# Altium PCB XMeter.PcbDoc
Units mm, origin at the board's own origin, x right, y up, seen from the top; angles counter-clockwise.
Board outline 138 x 50 mm, 2 copper layers (Top Layer, Bottom Layer); 81 components, 64 nets, 309 pads, 163 vias.
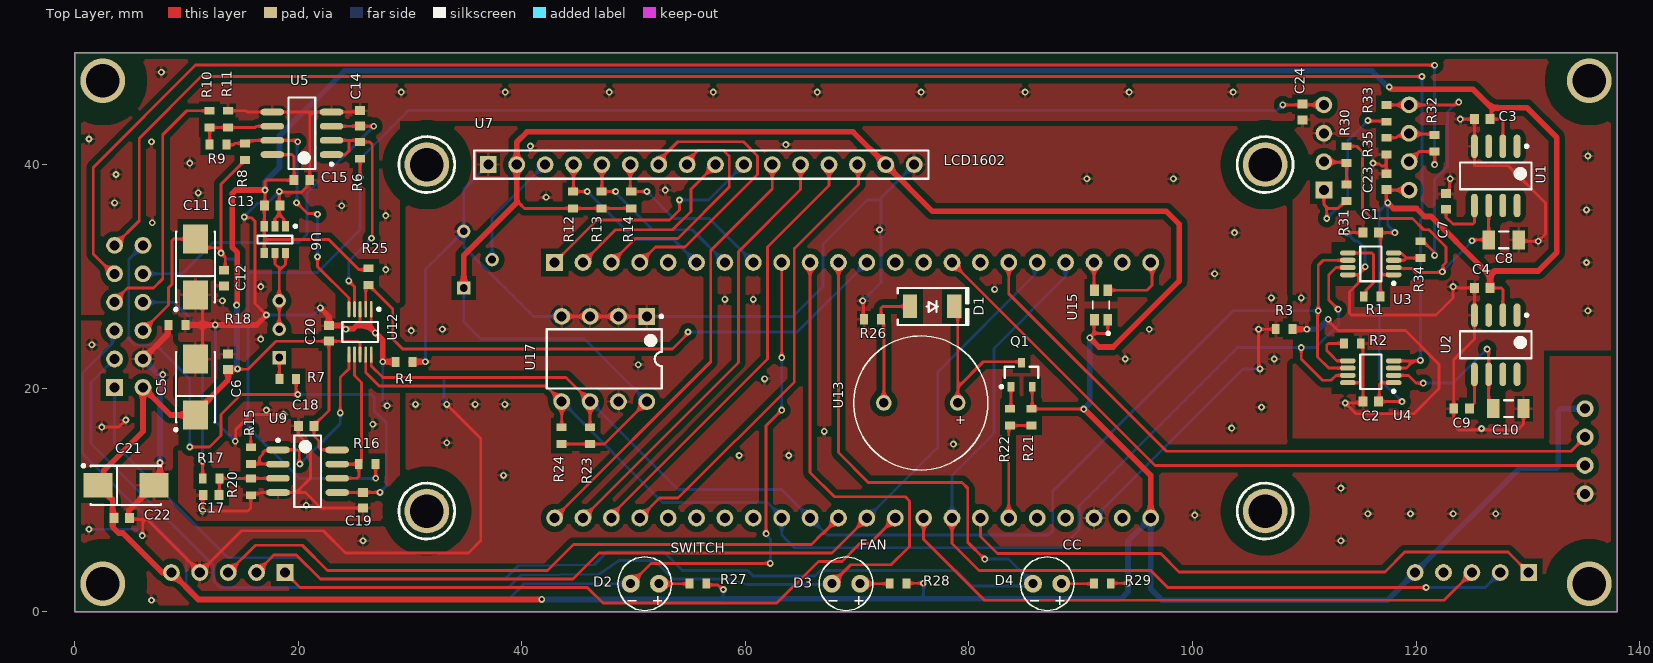
[diagram p0: Top Layer view]
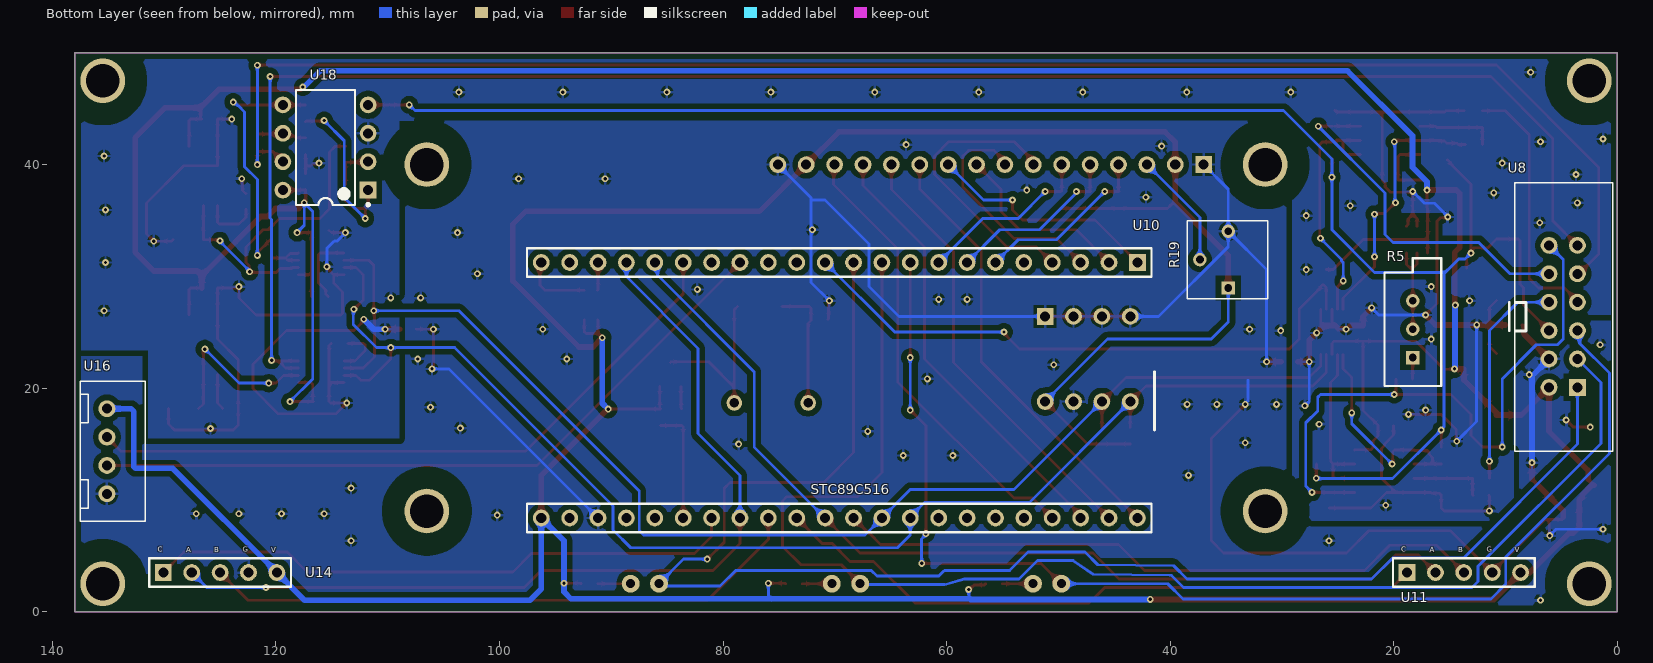
[diagram p1: Bottom Layer view, seen from below]

## Layer stack, top to bottom
Top Solder: solder mask 0.0102, Solder Resist, Dk 3.5
Top Layer: signal copper 0.0356
Dielectric 1: dielectric 0.32, FR-4, Dk 4.8
Bottom Layer: signal copper 0.0356
Bottom Solder: solder mask 0.0102, Solder Resist, Dk 3.5

## Board outline
0,0 138,0 138,50 0,50

## Design rules (kind name [scope] priority, off if disabled: settings)
Clearance Clearance_1 [WithinRoom('RoomDefinition1') or WithinRoom('RoomDefinition2') or WithinRoom('RoomDefinition3') or WithinRoom('RoomDefinition4') vs WithinRoom('RoomDefinition1') or WithinRoom('RoomDefinition2') or WithinRoom('RoomDefinition3') or WithinRoom('RoomDefinition4')] p1: gap=0.2 ignorepadtopadclearanceinfootprint=TRUE
Clearance [Not ( WithinRoom('RoomDefinition1') or WithinRoom('RoomDefinition2') or WithinRoom('RoomDefinition3') or WithinRoom('RoomDefinition4') ) vs Not ( WithinRoom('RoomDefinition1') or WithinRoom('RoomDefinition2') or WithinRoom('RoomDefinition3') or WithinRoom('RoomDefinition4') )] p2: gap=0.508 ignorepadtopadclearanceinfootprint=TRUE except(0.254: Track-THPad)
ComponentClearance [All] p1: gap=0.254 collisioncheckmode=3 verticalgap=0.254 showdistances=FALSE donotcheckwithout3dbody=TRUE
HoleSize [All] p1: absolutevalues=TRUE maxlimit=3.3 minlimit=0.025 maxpercent=80.000 minpercent=20.000
MinimumSolderMaskSliver SOT26A-6L [HasFootprint('SOT26A-6L') vs HasFootprint('SOT26A-6L')] p1: minsoldermaskwidth=0.09
MinimumSolderMaskSliver SG3030CM [HasFootprint('SG3030CM') vs HasFootprint('SG3030CM')] p2: minsoldermaskwidth=0.19
MinimumSolderMaskSliver TSSOP50 [HasFootprint('TSSOP50P490-10AL') vs HasFootprint('TSSOP50P490-10AL')] p3: minsoldermaskwidth=0.046
MinimumSolderMaskSliver [All] p4: minsoldermaskwidth=0.254
PolygonConnect [All] p1: connectstyle=Relief reliefconductorwidth=0.254 reliefentries=4 polygonreliefangle="90 Angle" airgapwidth=0.254
RoomDefinition RoomDefinition4 [False] p1: confinementstyle=ConfineIn formatcopy=TRUE lockcomponents=FALSE outline 15.621,30.607 15.621,35.687 20.066,35.687 20.066,30.607
RoomDefinition RoomDefinition3 [False] p2: confinementstyle=ConfineIn formatcopy=TRUE lockcomponents=FALSE outline 23.283,21.082 23.283,28.829 27.813,28.829 27.813,21.082
RoomDefinition RoomDefinition2 [False] p3: confinementstyle=ConfineIn formatcopy=TRUE lockcomponents=FALSE outline 112.395,19.465 112.395,23.445 119.507,23.445 119.507,19.465
RoomDefinition RoomDefinition1 [False] p4: confinementstyle=ConfineIn formatcopy=TRUE lockcomponents=FALSE outline 119.507,29.117 112.395,29.117 112.395,33.097 119.507,33.097
RoutingVias [All] p1: holewidth=0.305 width=0.61 viastyle="Through Hole" minholewidth=0.305 minwidth=0.61 maxholewidth=0.305 maxwidth=0.61
SMDEntry [InComponentClass('ChipClass')] p1: side=FALSE corner=FALSE anyangle=FALSE
SilkToSolderMaskClearance [IsPad] p1: minsilkscreentomaskgap=0.007 clearancetoexposedcopper=TRUE
SolderMaskExpansion [All] p1: expansion=0.102 istentingtop=FALSE
SupplyNets "Schematic Supply Nets_3" [InNet('-5')] p1: voltage=0.000
SupplyNets "Schematic Supply Nets_2" [InNet('AGND')] p2: voltage=0.000
SupplyNets "Schematic Supply Nets_1" [InNet('+5')] p3: voltage=0.000
SupplyNets "Schematic Supply Nets" [InNet('GND')] p4: voltage=0.000
Width [All] p1: maxlimit=4 minlimit=0.254 preferedwidth=0.254
26 further rules are at their usual default settings.

## Components (designator, comment, footprint, x,y, rotation, side; value= is the part's Value field where it differs from the comment)
C1 "" CAPC1608L 115.951,33.909 r0 top value=104
C2 "" CAPC1608L 115.959,18.796 r0 top value=104
C3 "" CAPC1608L 125.93,44.069 r0 top value=105
C4 "" CAPC1608L 125.93,28.962 r0 top value=105
C5 "16V" TC6032-2412 10.795,20.09 r90 top value=100uF
C6 "" CAPC1608L 13.716,22.352 r270 top value=104
C7 "" CAPC1608L 122.682,36.703 r270 top value=105
C8 "" C1206 127.85,33.274 r0 top value=226
C9 "" CAPC1608L 124.079,18.161 r0 top value=105
C10 "" C1206 128.27,18.161 r0 top value=226
C11 "16V" TC6032-2412 10.795,30.837 r90 top value=100uF
C12 "" CAPC1608L 13.335,29.845 r270 top value=104
C13 "" CAPC1608L 17.653,36.322 r180 top value=474
C14 "" CAPC1608L 25.527,44.134 r270 top value=106
C15 "" CAPC1608L 20.32,38.608 r180 top value=104
C17 "" CAPC1608L 12.192,10.418 r0 top value=106
C18 "" CAPC1608L 20.701,16.629 r0 top value=104
C19 "" CAPC1608L 25.781,9.96 r90 top value=106
C20 "" CAPC1608L 22.733,24.9 r270 top value=104
C21 "16V" TC6032-2412 4.572,11.303 r0 top value=100uF
C22 "" CAPC1608L 4.191,8.382 r180 top value=104
C23 "" CAPC1608L 117.348,38.481 r90 top value=104
C24 "" CAPC1608L 109.855,44.704 r270 top value=104
D1 "SS12" "DO214AC SMA" 76.708,27.305 r0 top
D2 "SWITCH" LED 51,2.5 r270 top locked
D3 "FAN" LED 69,2.5 r270 top locked
D4 "CC" LED 87,2.5 r270 top locked
Q1 "S8550(2TY)" SOT-23B_L 84.709,21.209 r90 top
R1 "" RESC1608L 116.078,28.194 r180 top value=10K
R2 "" RESC1608L 114.308,24.003 r0 top value=10K
R3 "" RESC1608L 108.204,25.273 r180 top value=0R
R4 "" RESC1608L 29.464,22.352 r0 top value=0R
R5 "" VR5 18.288,25.273 r90 bottom value=10K
R6 "" RESC1608L 25.527,41.275 r90 top value=47K
R7 "" RESC1608L 19.05,20.828 r0 top value=43K
R8 "" RESC1608L 15.24,41.148 r90 top value=47K
R9 "" RESC1608L 12.815,41.783 r180 top value=20K
R10 "" RESC1608L 12.065,44.069 r90 top value=150K
R11 "" RESC1608L 13.716,44.069 r90 top value=20K
R12 "" RESC1608L 44.577,36.83 r90 top value=4.7K
R13 "" RESC1608L 47.117,36.83 r90 top value=4.7K
R14 "" RESC1608L 49.784,36.83 r90 top value=4.7K
R15 "" RESC1608L 15.748,13.962 r270 top value=47K
R16 "" RESC1608L 26.162,13.208 r180 top value=47K
R17 "" RESC1608L 12.192,11.93 r0 top value=10M
R18 "" RESC1608L 9.144,25.654 r180 top value=0R
R19 "" VR4 36.068,31.496 r90 bottom value=1K
R20 "" RESC1608L 15.748,11.168 r270 top value=1M
R21 "" RESC1608L 85.598,17.399 r90 top value=10K
R22 "" RESC1608L 83.693,17.399 r90 top value=4.7K
R23 "" RESC1608L 46.101,15.748 r90 top value=10K
R24 "" RESC1608L 43.561,15.748 r90 top value=10K
R25 "" RESC1608L 26.289,29.972 r270 top value=10K
R26 "" RESC1608L 71.374,26.162 r0 top value=100
R27 "" RESC1608L 55.753,2.5 r0 top value=1K
R28 "" RESC1608L 73.66,2.5 r0 top value=1K
R29 "" RESC1608L 91.936,2.5 r0 top value=1K
R30 "" RESC1608L 113.792,40.894 r90 top value=30K
R31 "" RESC1608L 113.792,37.477 r270 top value=1K
R32 "" RESC1608L 121.666,41.91 r90 top value=10K
R33 "" RESC1608L 117.348,44.577 r270 top value=10K
R34 "" RESC1608L 120.396,32.385 r90 top value=10K
R35 "" RESC1608L 117.348,41.656 r270 top value=10K
U1 "REF5025" SOP127P636-8L 127.135,38.989 r270 top
U2 "REF5025" SOP127P636-8L 127.135,23.882 r270 top
U3 "DAC8571" TSOP65P490-8AL 115.951,31.115 r180 top
U4 "DAC8571" TSOP65P490-8AL 115.951,21.463 r180 top
U5 "OPA2335" SOP127P636-8L 20.32,42.799 r180 top
U6 "REF3230" SOT26A-6L 17.907,33.282 r270 top
U7 "LCD1602" LCD1602 37,40 r0 top locked
U8 "DC3-12P" DC3-12P 3.556,20.066 r90 bottom
U9 "OPA2335" SOP127P636-8L 20.828,12.565 r0 top
U10 "STC89C516CORE" STC89516CORE 42.926,31.242 r0 bottom locked
U11 "CODEKEY(MOD)" CODEKEY 18.8,3.5 r180 bottom locked
U12 "ADS1115" TSSOP50P490-10AL 25.527,25.027 r270 top
U13 "BEEPER" BEEPER 75.692,18.669 r180 top
U14 "CODEKEY(SET)" CODEKEY 130.08,3.5 r180 bottom locked
U15 "SG3030CM" SG3030CM 91.821,27.432 r90 top
U16 "SERIAL4P" X254-4P 135.128,14.351 r90 bottom
U17 "AT24C04" DIP-8 47.371,22.606 r270 top
U18 "TL082" DIP-8 115.57,41.529 r0 bottom locked

## Footprints (in the part's own frame and the unit in brackets; to place one, negate y for a bottom-side part, rotate by r counter-clockwise, add the part's x,y. Pads: shape width x height; smd on the part's side, far side on the other; paste and mask are expansions set on the pad)
BEEPER [mm] "BEEPER"
  round 1.4 hole 0.85: 1(-3.3,0) 2(3.3,0)
  silkscreen extent -6,-6 6,6
C1206 [mm] "Chip Capacitor, Body 3.2x1.6mm, IPC High Density"
  rect 1.1x1.7 smd: 1(-1.35,0) 2(1.35,0)
  silkscreen extent -0.4,-0.75 0.4,0.75, body extent -1.7,-0.9 1.7,0.9, height 1.3
CAPC1608L [mm] "Chip Capacitor, Body 1.6x0.8mm, IPC High Density"
  rect 0.8x0.9 smd: 1(-0.7,0) 2(0.7,0)
  body extent -0.87,-0.48 0.87,0.48, height 0.85
CODEKEY [mm] "CODEKEY"
  rect 1.5x1.5 hole 0.9: 1(0,0)
  round 1.5 hole 0.9: 2(2.54,0) 3(5.08,0) 4(7.62,0) 5(10.16,0)
  silkscreen extent -1.27,-1.27 11.43,1.27
DC3-12P [mm] "Connector; Header; 6x2 Position"
  rect 1.5x1.5 hole 0.9: 1(0,0)
  round 1.5 hole 0.9: 2(2.54,0) 3(5.08,0) 4(7.62,0) 5(10.16,0) 6(12.7,0) 7(12.7,2.54) 8(10.16,2.54) 9(7.62,2.54) 10(5.08,2.54) 11(2.54,2.54) 12(0,2.54)
  silkscreen extent -5.71,-3.18 18.29,6.1
DIP-8 [mm] "DIP; 8 Leads; Row Spacing 7.62 mm; Pitch 2.54 mm"
  rect 1.5x1.5 hole 0.9: 1(-3.81,3.81)
  round 1.5 hole 0.9: 2(-3.81,1.27) 3(-3.81,-1.27) 4(-3.81,-3.81) 5(3.81,-3.81) 6(3.81,-1.27) 7(3.81,1.27) 8(3.81,3.81)
  silkscreen extent -3.93,-5.15 2.65,5.24, body extent -3.6,-5.15 3.6,5.15, height 5.08
"DO214AC SMA" [mm] "Molded Diode, 2-Leads, Body 4.30x2.60mm, IPC Medium Density"
  rect 1.27x2.1 smd: 1(-1.985,0) 2(1.985,0)
  silkscreen extent -3.08,-1.65 3.25,1.65, body extent -2.6,-1.37 2.6,1.37, height 2.4
LCD1602 [mm] "LCD1602"
  round 4 hole 3: 0(-5.5,-31) 0(-5.5,0) 0(69.5,-31) 0(69.5,0)
  rect 1.5x1.5 hole 0.9: 1(0,0)
  round 1.5 hole 0.9: 2(2.54,0) 3(5.08,0) 4(7.62,0) 5(10.16,0) 6(12.7,0) 7(15.24,0) 8(17.78,0) 9(20.32,0) 10(22.86,0) 11(25.4,0) 12(27.94,0) 13(30.48,0) 14(33.02,0) 15(35.56,0) 16(38.1,0)
  silkscreen extent -8,-33.5 72,2.5
LED [mm] "LED; 2 Leads"
  round 1.6 hole 0.8: 1(0,1.27) 2(0,-1.27)
  silkscreen extent -2.4,-2.4 2.4,2.4
RESC1608L [mm] "Chip Resistor, Body 1.6x0.8mm, IPC High Density"
  rect 0.7x0.9 smd: 1(-0.75,0) 2(0.75,0)
  body extent -0.85,-0.48 0.85,0.48, height 0.6
SG3030CM [mm]
  rect 1.05x0.8 smd: 1(-1.325,-0.6) 2(1.325,-0.6) 3(1.325,0.6) 4(-1.325,0.6)
  silkscreen extent -2.66,-0.76 0.38,0.75
SOP127P636-8L [mm] "SOP, 8-Leads, Body 6x4.7mm, Pitch 1.27mm, IPC High Density"
  oval 2.1x0.6 smd: 1(-2.65,1.905) 2(-2.65,0.635) 3(-2.65,-0.635) 4(-2.65,-1.905) 5(2.65,-1.905) 6(2.65,-0.635) 7(2.65,0.635) 8(2.65,1.905)
  silkscreen extent -2.77,-3.2 1.2,3.2, body extent -2.36,-3.18 2.36,3.18, height 1.5
SOT26A-6L [mm] "SOT23, 6-Leads, Body 2.9x1.7mm, Pitch 0.95mm, Lead Span 2.8mm, IPC High Density"
  rect 0.9x0.65 smd: 1(-1.2,0.95) 2(-1.2,0) 3(-1.2,-0.95) 4(1.2,-0.95) 5(1.2,0) 6(1.2,0.95)
  silkscreen extent -1.32,-1.55 0.35,1.95, body extent -0.9,-1.55 0.9,1.55, height 1.45
SOT-23B_L [mm] "SOT23, 3-Leads, Body 2.9x1.3mm, Pitch 0.95mm, Lead Span 2.4mm, IPC High Density"
  rect 0.85x0.6 smd: 1(-1.075,0.95) 2(-1.075,-0.95) 3(1.075,0)
  silkscreen extent -1.2,-1.5 0.7,1.92, body extent -0.7,-1.5 0.7,1.5, height 1.14
STC89516CORE [mm]
  rect 1.5x1.5 hole 0.9: 1(0,0)
  round 1.5 hole 0.9: 2(2.54,0) 3(5.08,0) 4(7.62,0) 5(10.16,0) 6(12.7,0) 7(15.24,0) 8(17.78,0) 9(20.32,0) 10(22.86,0) 11(25.4,0) 12(27.94,0) 13(30.48,0) 14(33.02,0) 15(35.56,0) 16(38.1,0) 17(40.64,0) 18(43.18,0) 19(45.72,0) 20(48.26,0) 21(50.8,0) 22(53.34,0) 23(53.34,22.86) 24(50.8,22.86) 25(48.26,22.86) 26(45.72,22.86) 27(43.18,22.86) 28(40.64,22.86) 29(38.1,22.86) 30(35.56,22.86) 31(33.02,22.86) 32(30.48,22.86) 33(27.94,22.86) 34(25.4,22.86) 35(22.86,22.86) 36(20.32,22.86) 37(17.78,22.86) 38(15.24,22.86) 39(12.7,22.86) 40(10.16,22.86) 41(7.62,22.86) 42(5.08,22.86) 43(2.54,22.86) 44(0,22.86)
  silkscreen extent -1.52,-1.27 54.61,24.13
TC6032-2412 [mm] "Capacitor, SM Tantalum; Body 6.0 x 3.2 mm (LxW typ)"
  rect 2.6x2.2 smd: 1(-2.5,0) 2(2.5,0)
  silkscreen extent -3.92,-1.75 3.15,1.87
TSOP65P490-8AL [mm] "TSOP, 8-Leads, Body 3x3mm, Pitch 0.65mm, IPC High Density"
  oval 1.4x0.45 smd: 1(-2.05,0.975) 2(-2.05,0.325) 3(-2.05,-0.325) 4(-2.05,-0.975) 5(2.05,-0.975) 6(2.05,-0.325) 7(2.05,0.325) 8(2.05,0.975)
  silkscreen extent -2.17,-1.55 0.95,1.87, body extent -1.6,-1.6 1.6,1.6, height 1.1
TSSOP50P490-10AL [mm] "TSSOP, 10-Leads, Body 3x3mm, Pitch 0.5mm, IPC High Density"
  oval 1.45x0.25 smd: 1(-2.025,1) 2(-2.025,0.5) 3(-2.025,0) 4(-2.025,-0.5) 5(-2.025,-1) 6(2.025,-1) 7(2.025,-0.5) 8(2.025,0) 9(2.025,0.5) 10(2.025,1)
  silkscreen extent -2.15,-1.6 0.9,1.8, body extent -1.6,-1.6 1.6,1.6, height 1.1
VR4 [mm] "Thru-Hole; 3 Leads"
  rect 1.2x1.2 hole 0.7: 1(-2.54,-1.27)
  round 1.2 hole 0.7: 2(2.54,-1.27) 3(0,1.27)
  silkscreen extent -3.5,-4.8 3.5,2.41, body extent -3.56,-4.83 3.56,2.41, height 5
VR5 [mm] "Thru-Hole; 3 Leads"
  round 1.2 hole 0.7: 1(2.54,0) 3(0,0)
  rect 1.2x1.2 hole 0.7: 2(-2.54,0)
  silkscreen extent -5.08,-2.54 6.35,2.54, body extent -4.95,-2.29 4.95,2.29, height 10
X254-4P [mm] "X254-4P"
  oval 1.5x1.524 hole 0.9: 1(-3.81,0) 2(-1.27,0) 3(1.27,0) 4(3.81,0)
  silkscreen extent -6.25,-3.43 6.25,2.41, body extent -6.22,-3.43 6.22,2.41, height 7

## Part data
C1 C2 C3 C4 C6 C7 C8 C9 C10 C12 C13 C14 C15 C17 C18 C19 C20 C22 C23 C24: library part Cap, "Capacitor", LatestRevisionDate=17-Jul-2002, LatestRevisionNote="Re-released for DXP Platform.", PackageDescription="Radial Cap, Thru-Hole; 2 Leads; 0.3 in Pin Spacing", PackageReference=RAD-0.3, Published=8-Jun-2000, Publisher="Altium Limited"
C5 C11 C21: library part "Cap Pol1", "Polarized Capacitor (Radial)", LatestRevisionDate=17-Jul-2002, LatestRevisionNote="Re-released for DXP Platform.", PackageDescription="Polarized Capacitor (Radial); 2 Leads", PackageReference=RB7.6-15, Published=8-Jun-2000, Publisher="Altium Limited"
D1: library part "Diode 1N4007", "1 Amp General Purpose Rectifier", Code_JEDEC=DO-204-AL, ComponentLink1Description="Manufacturer Link", ComponentLink1URL=http://www.fairchildsemi.com/, ComponentLink2Description=Datasheet, ComponentLink2URL=http://www.fairchildsemi.com/ds/1N%2F1N4001.pdf, DatasheetVersion=1998, LatestRevisionDate=17-Jul-2002, LatestRevisionNote="Re-released for DXP Platform.", PackageDescription="Diode, Axial; Body 5.2 x 2.7 mm (LxDia. max), Lead Dia. 0.86 mm (max)", PackageReference=DO-41, PackageVersion=Aug-1999, Published=8-Jun-2000, Publisher="Altium Limited"
D2 D3 D4: library part LED1, "Typical RED GaAs LED", LatestRevisionDate=08-Jul-2005, LatestRevisionNote="Mech Layer 1 removed.", PackageDescription="LED; 2 Leads", PackageReference=LED-1, Published=8-Jun-2000, Publisher="Altium Limited"
Q1: library part PNP, "PNP Bipolar Transistor", LatestRevisionDate=29-May-2009, LatestRevisionNote="IPC-7351 Footprint Added.", PackageDescription="3-Pin SOT-23 Package 0.95 mm Pitch, 2.4 mm Lead Span", PackageReference=SOT-23B, PackageVersion=Aug-1999, Published=8-Jun-2000, Publisher="Altium Limited"
R1 R2 R3 R4 R6 R7 R8 R9 R10 R11 R12 R13 R14 R15 R16 R17 R18 R20 R21 R22 R23 R24 R25 R26 R27 R28 R29 R30 R31 R32 R33 R34 R35: library part Res1, "Resistor", LatestRevisionDate=17-Jul-2002, LatestRevisionNote="Re-released for DXP Platform.", PackageDescription="Axial Device, Thru-Hole; 2 Leads; 0.3 in Pin Spacing", PackageReference=AXIAL-0.3, Published=8-Jun-2000, Publisher="Altium Limited"
R5 R19: library part RPot, "Potentiometer", LatestRevisionDate=17-Jul-2002, LatestRevisionNote="Re-released for DXP Platform.", PackageDescription="Variable Resistor, Thru-Hole; 3 Leads", PackageReference=VR5, Published=8-Jun-2000, Publisher="Altium Limited", Set Position=0.5, Sim Note="Enter the Resistance value and the set point into parameter fields."
U11 U14: library part CODEKEY, "CODEKEY"

## Free pads (board coordinates)
  round 4 hole 3: 0(2.5,2.5) 0(135.5,2.5) 0(135.5,47.5)
  round 4 hole 3 mask+0.102: 0(2.5,47.5)

## Via types
v1: diameter 0.61, hole 0.305, Top Layer to Bottom Layer, 163 vias

## Nets (pads, with @x,y where several pads share a name; then routed paths per layer and width w, separated by ;. In a path a pad name is that pad's centre, name@x,y a point inside that pad or via, vN(x,y) a via of type N, cw(c..) or ccw(c..) an arc to the next point about the centre after c; other vN are vias at no path point)
+5: C1.2 C2.2 C3.2 C4.2 C5.1 C6.2 C13.2 C15.2 C18.2 C20.2 C21.1 C22.2 C23.1 Q1.2 R1.1 R12.1 R13.1 R14.1 R19.1 R21.2 R23.1 R24.1 R25.1 R27.2 R28.2 R29.2 U1.2 U2.2 U3.1 U4.1 U5.8 U6.3 U6.4 U7.2 U7.15 U8.12 U9.8 U10.23 U11.5 U12.8 U14.5 U15.1 U15.4 U16.4 U17.8 U18.8 | length 624.8
  Top Layer w0.254: C21.1 C21.1@2.602,11.833 ; C5.1 C5.1@10.795,17.79 ; C6.2@13.716,21.69 C6.2@13.743,21.717 ; v1(14.554,21.717) 14.581,21.69 15.506,21.69 18.016,24.2 C20.2 ; U6.4 16.957,33.282 ; U5.8 19.431,40.894 19.62,40.705 C15.2 17.167,38.608 17.018,38.459 v1(17.018,37.719) 17.018,37.465 17.018,36.129 16.957,36.068 U6.3 16.957,33.282 ; U9.8 23.47,14.478 22.047,14.478 21.844,14.681 21.844,15.272 21.401,15.715 C18.2 21.401,16.679 22.733,18.011 C20.2 ; U12.8 25.527,24.003 25.33,24.2 C20.2 ; R25.1@26.027,30.603 25.404,30.603 22.725,33.282 16.957,33.282 ; 39.54,36.619 39.54,36.787 40.247,36.08 R12.1 R13.1 R14.1 ; R24.1 R23.1 47.383,14.998 U17.8 ; R27.2 56.615,2.388 57.522,2.388 57.93,1.981 v1(58.026,1.981) ; R28.2 74.45,2.54 v1(75.946,2.54) ; Q1.2 85.659,18.21 R21.2 85.613,18.134 90.264,18.134 v1(90.279,18.119) ; v1(90.805,24.511) 91.186,24.892 ; U15.4 91.186,26.072 91.186,24.892 ; U15.1 92.421,25.041 92.272,24.892 91.186,24.892 ; R29.2 92.726,2.54 v1(94.234,2.54) ; R1.1 116.828,30.353 ; v1(117.475,36.576) 117.475,36.672 117.348,36.799 C23.1 117.41,37.719 U18.8 ; U4.1 116.881,20.488 116.713,20.32 116.713,18.85 C2.2 v1(118.745,18.796) ; U3.1 117.053,30.14 116.84,30.353 116.84,33.974 116.905,33.909 v1(118.11,33.909) ; C4.2@126.636,28.956 127.621,28.956 127.77,28.807 U2.2 ; 126.746,45.085 126.746,44.185 C3.2 127.621,44.069 127.77,43.92 U1.2
  Top Layer w0.508: C21.1 2.272,11.303 3.118,10.457 3.118,10.257 3.383,9.992 3.383,7.581 3.921,7.043 4.284,7.043 7.827,3.5 U11.5 11.048,1.092 v1(41.783,1.092) ; C21.1@2.602,11.833 2.602,12.635 6.096,16.129 U8.12 8.572,17.59 C5.1 ; C5.1@10.795,17.79 13.716,20.711 C6.2 ; C6.2@13.743,21.717 v1(14.554,21.717) ; v1(14.478,27.432) 14.478,27.46 14.547,27.529 14.547,32.123 14.097,32.573 14.097,37.421 14.395,37.719 v1@16.99,37.719 ; R19.1 34.798,31.877 39.54,36.619 ; 39.54,36.787 U7.2 39.54,42.015 40.451,42.926 69.634,42.926 U7.15 76.746,35.814 97.663,35.814 98.806,34.671 98.806,29.591 92.9,23.685 91.63,23.685 v1(90.805,24.511) ; v1@90.309,18.149 96.266,12.192 U10.23 ; v1(117.475,36.576) 117.983,36.068 120.052,36.068 120.763,35.357 121.361,35.357 123.571,33.147 123.571,33.126 126.63,30.067 ; v1(117.602,46.939) 117.63,46.939 117.833,46.736 125.095,46.736 126.746,45.085 129.921,45.085 132.588,42.418 132.588,32.131 130.937,30.48 127.043,30.48 126.63,30.067 ; C4.2 126.63,30.067
  Bottom Layer w0.254: v1(14.478,27.432) v1@14.516,27.394 ; v1@14.516,21.755 v1(14.554,21.717) ; R19.1 34.798,25.908 36.322,24.384 45.593,24.384 U17.8 ; 57.89,1.143 57.915,1.168 57.988,1.241 v1(58.026,1.981) ; 75.692,1.143 75.946,1.397 v1(75.946,2.54) ; v1@117.506,46.939 v1(117.602,46.939) ; v1@118.11,33.937 117.475,34.572 v1(117.475,36.576) 116.713,35.814 116.713,20.828 v1(118.745,18.796)
  Bottom Layer w0.508: v1@14.516,21.755 v1@14.516,27.394 ; v1(17.018,37.719) 17.018,38.459 18.318,39.759 18.318,42.575 24.13,48.387 116.058,48.387 v1@117.506,46.939 ; v1(41.783,1.092) 57.839,1.092 57.89,1.143 75.692,1.143 75.946,1.143 93.599,1.143 94.234,1.778 v1@94.234,2.286 ; v1(90.279,18.119) 90.805,18.645 v1(90.805,24.511) ; v1(94.234,2.54) 94.234,6.35 U10.23 96.266,2.032 97.282,1.016 117.436,1.016 U14.5 129.247,12.827 132.566,12.827 132.715,12.976 132.715,17.907 132.969,18.161 U16.4 ; v1(118.11,33.909) v1@118.11,33.937
-5: C11.2 C12.1 C24.1 R6.1 R8.1 R15.1 R16.1 U8.10 U18.4 | length 165.8
  Top Layer w0.254: U8.10 8.382,27.432 8.382,28.978 8.699,29.294 8.699,33.188 8.847,33.337 C11.2 11.567,32.565 12.806,32.565 v1@13.013,32.359 ; C12.1@13.462,30.734 13.462,31.699 v1(13.081,32.08) 13.081,38.239 14.917,40.075 14.917,40.175 15.14,40.398 R8.1 ; R15.1 v1(15.748,16.256) ; v1(25.527,38.862) R6.1 ; R16.1 26.918,13.202 26.918,11.936 v1(26.924,11.93) ; v1(108.077,45.339) 109.79,45.339 C24.1 109.92,45.339 U18.4
  Bottom Layer w0.254: v1(13.081,32.08) 13.612,31.549 14.171,31.549 15.032,30.688 15.367,30.353 ; v1@26.924,11.9 20.104,11.9 v1(15.748,16.256) 15.748,16.329 15.494,16.583 15.494,30.226 15.367,30.353 ; v1(108.077,45.339) 107.569,44.831 29.845,44.831 25.527,40.513 v1(25.527,38.862) 25.527,34.163 21.717,30.353 15.367,30.353
ADC_CURRENT: R6.2 U5.1 U5.2 U12.4 | length 22.1
  Top Layer w0.254: U5.1 24.198,40.894 24.545,41.241 24.545,42.071 24.638,42.164 ; U5.2 24.638,42.164 ; v1(24.511,29.591) 25.027,29.075 25.027,28.829 U12.4 ; R6.2@25.273,42.025 25.134,42.164 24.638,42.164 ; R6.2 26.394,42.025 26.612,41.807 26.612,33.722 ; v1(26.543,33.401) 26.611,33.469 26.611,33.721
  Bottom Layer w0.254: v1(24.511,29.591) 24.511,31.22 24.66,31.369 24.66,31.518 v1(26.543,33.401)
ADC_TEMP: R16.2 U9.6 U9.7 U12.7 | length 15.2
  Top Layer w0.254: U9.6 25.263,11.93 25.412,12.079 R16.2 ; U9.7 25.404,13.2 R16.2 ; U12.7 25.027,21.139 25.084,21.082 25.654,20.512 25.654,13.68 25.635,13.661 25.635,13.431 R16.2
ADC_VDIS: R15.2 U9.1 U9.2 U12.6 | length 19.8
  Top Layer w0.254: R15.2 15.754,13.206 16.51,13.206 ; U9.2 18.172,13.206 16.51,13.206 ; v1(20.142,13.208) 20.074,13.276 20.074,14.313 19.917,14.47 U9.1 18.112,14.404 16.982,14.404 16.833,14.255 16.833,14.099 16.51,13.776 16.51,13.206 ; v1(23.749,17.78) 23.749,20.955 23.876,21.082 24.527,21.733 U12.6
  Bottom Layer w0.254: v1(20.142,13.208) 23.749,16.815 v1(23.749,17.78)
ADC_VOUT: R8.2 R9.1 U5.7 U12.5 | length 24.2
  Top Layer w0.254: R9.1 14.224,41.783 14.351,41.91 15.228,41.91 R8.2 15.463,42.121 15.959,42.121 16.002,42.164 U5.7 19.716,42.164 19.843,42.037 v1(19.939,42.037) ; v1(19.837,36.583) 19.856,36.583 20.418,36.021 20.811,35.628 21.649,35.628 v1(21.717,35.56) ; v1(21.717,31.75) 21.717,30.861 24.527,28.051 U12.5
  Bottom Layer w0.254: v1(19.837,36.583) 19.894,36.64 19.894,41.992 v1(19.939,42.037) ; v1@21.59,35.687 v1(21.717,35.56) v1(21.717,31.75)
AGND: C1.1 C2.1 C3.1 C4.1 C5.2 C6.1 C7.1 C8.2 C9.1 C10.2 C11.1 C12.2 C13.1 C14.1 C15.1 C17.1 C18.1 C19.1 C20.1 C23.2 C24.2 R2.2 R3.1 R4.1 R11.2 R18.1 R20.2 R35.2 U1.4 U2.4 U3.8 U4.8 U5.4 U5.5 U6.1 U6.2 U9.4 U12.1 U12.3 U18.3 | length 221.4
  Top Layer w0.254: C5.2@10.795,23.09 11.43,23.725 11.43,25.654 11.43,27.202 C11.1@10.795,27.837 ; C17.1 11.43,10.356 v1(11.43,9.017) 15.494,9.017 15.748,9.271 R20.2 15.924,10.594 16.579,10.594 16.645,10.66 U9.4 19.804,10.66 ; R11.2 15.317,44.819 15.367,44.769 15.432,44.704 U5.5 21.336,44.704 ; v1(14.351,15.24) 14.396,15.285 14.396,16.053 14.406,16.063 14.406,16.311 15.748,17.653 v1(18.669,17.653) 18.977,17.653 ; v1(15.164,35.306) 15.232,35.238 15.621,35.238 15.816,35.238 16.129,34.925 16.129,30.607 16.129,27.559 v1(17.145,26.543) ; U6.2 17.907,35.179 18.288,35.56 ; U6.1 18.709,34.63 18.709,35.139 18.288,35.56 ; C18.1 20.001,15.809 20.828,14.982 20.828,14.859 21.082,14.605 21.082,11.938 19.804,10.66 ; v1@24.161,25.273 v1(24.257,25.273) v1@24.308,25.324 ; 25.219,25.6 25.527,25.908 U12.3 ; C14.1@25.273,44.834 25.143,44.704 U5.4 21.336,44.704 ; C19.1 25.77,9.271 22.027,9.271 20.638,10.66 19.804,10.66 ; 26.235,25.6 26.527,25.892 U12.1 ; v1@27.872,18.347 v1(27.94,18.415) ; v1@112.268,25.908 113.03,25.146 119.058,25.146 122.069,22.136 122.069,19.961 119.819,17.711 114.623,17.711 v1(113.665,18.669) 115.132,18.669 C2.1 115.259,20.25 ; v1(113.792,33.909) 115.047,33.909 C1.1@115.251,34.113 ; U4.8 115.021,20.488 115.259,20.25 ; U3.8 114.849,30.14 ; R2.2 115.259,23.802 115.259,20.25 ; v1(115.443,30.861) 115.443,30.765 115.016,30.337 115.016,30.307 114.849,30.14 ; v1(116.151,40.132) 116.219,40.064 116.743,40.064 116.928,39.878 117.182,39.878 117.348,40.044 ; C23.2 117.348,40.044 ; R35.2 117.348,40.044 ; C7.1 122.732,37.403 123.005,37.676 123.005,38.677 v1(123.063,38.735) ; v1(123.952,44.069) C3.1 U1.4 125.23,39.901 128.247,39.901 131.572,36.576 131.572,33.782 v1(130.937,33.147) 129.327,33.147 C8.2 ; C10.2 129.62,16.8 129.054,16.234 129.032,16.256 123.825,16.256 123.379,16.702 C9.1 123.379,22.541 125.23,24.392 U2.4 C4.1 123.534,28.962 123.413,29.083 v1(123.317,29.083) 123.317,28.067 121.793,26.543 114.195,26.543 114.046,26.692 114.046,28.61 114.828,29.393 114.828,30.119 114.849,30.14 ; 18.288,35.56 18.288,36.257 C13.1 18.288,36.387 v1(18.288,37.592) 18.384,37.592 18.453,37.523 20.283,37.523 20.747,37.987 20.747,38.335 C15.1 21.02,44.388 21.336,44.704
  Top Layer w0.508: R18.1@10.021,25.654 11.43,25.654 v1(12.573,25.654) 16.256,25.654 v1(17.145,26.543) ; v1(21.971,27.178) 22.733,26.416 C20.1 23.283,25.6 23.834,25.6 v1@24.161,25.273 ; v1@24.308,25.324 24.943,25.324 25.219,25.6 26.235,25.6 27.559,24.276 v1(27.559,22.352) R4.1@28.587,22.352 ; R3.1 v1(110.236,25.273)
  Bottom Layer w0.254: v1(12.573,25.654) 12.573,17.018 v1(14.351,15.24) ; v1(15.164,35.306) 15.164,35.357 16.342,36.535 17.231,36.535 v1(18.288,37.592) ; v1(17.145,26.543) 21.336,26.543 v1(21.971,27.178) ; v1(27.559,22.352) 27.559,18.796 v1(27.94,18.415) v1@28.048,18.307 ; v1(113.792,33.909) 114.525,33.176 114.779,33.176 114.858,33.097 115.443,32.512 v1(115.443,30.861)
  Bottom Layer w0.508: v1(110.236,25.273) 111.252,25.273 v1(112.141,26.162)
  other v1: 20.701,9.525 125.857,16.383 26.67,16.764 17.145,18.034 16.637,24.384 26.897,24.938 135.382,26.924 13.208,27.813 109.728,28.067 16.637,29.083 27.813,30.607 135.255,31.242 6.934,34.798 27.813,35.433 135.255,35.941 23.876,36.322 3.556,36.576 11.049,37.465 3.683,39.116 10.287,40.132 135.382,40.767 6.858,42.037 1.27,42.291 29.21,46.482 38.513,46.482 47.816,46.482 57.118,46.482 66.421,46.482 75.724,46.482 85.026,46.482 94.329,46.482 103.632,46.482 7.747,48.26
BEEPER: R21.1 R22.1 U10.28 | length 10.2
  Top Layer w0.254: U10.28 83.566,16.522 R22.1 R21.1
CC: D4.2 U8.1 U10.11 | length 137.1
  Top Layer w0.254: U10.11 68.326,14.224 70.993,11.557 79.375,11.557 79.895,11.037 79.895,6.211 v1(81.407,4.699)
  Bottom Layer w0.254: U8.1 3.556,14.986 13.716,4.826 20.066,4.826 21.971,2.921 38.485,2.921 39.676,4.112 46.482,4.191 47.625,5.334 52.705,5.334 54.356,3.683 60.198,3.683 60.272,3.609 60.705,3.176 66.233,3.176 66.738,3.681 78.869,3.681 80.264,2.286 85.516,2.286 D4.2 83.531,4.699 v1(81.407,4.699)
FAN: D3.2 U8.2 U10.10 | length 123.6
  Top Layer w0.254: U10.10 65.786,12.446 67.945,10.287 74.295,10.287 74.676,9.906 74.676,5.842 73.025,4.191 69.421,4.191 D3.2
  Bottom Layer w0.254: U8.2 1.46,20.511 1.46,15.05 12.446,4.064 12.446,2.689 12.976,2.159 38.8,2.159 39.83,3.189 39.903,3.262 40.007,3.263 46.887,3.343 48.661,4.572 51.868,4.572 53.511,2.929 53.511,2.921 58.415,2.921 60.175,2.414 67.644,2.414 D3.2
FED_C: R32.1 U8.5 U18.7 | length 146.9
  Top Layer w0.254: U8.5 3.429,30.226 1.651,32.004 1.651,39.751 10.795,48.895 v1(121.666,48.895) ; U18.7 120.281,41.16 R32.1 v1(121.666,39.997)
  Bottom Layer w0.254: v1(121.666,39.997) v1(121.666,48.895)
FED_C_REF_2.5: C8.1 R30.2 U1.6 U3.2 | length 31
  Top Layer w0.254: R30.2 114.693,41.644 115.211,41.126 115.211,36.046 116.078,35.179 119.683,35.179 120.699,34.163 121.158,34.163 122.682,32.639 122.682,31.225 122.428,30.971 122.428,30.48 v1(122.36,30.412) 122.16,30.412 122.101,30.353 119.98,30.353 119.641,30.692 119.507,30.692 118.627,30.692 118.529,30.79 U3.2 ; v1(125.013,33.192) 125.11,33.192 125.191,33.274 C8.1 U1.6
  Bottom Layer w0.254: v1(122.36,30.412) 122.36,30.475 125.013,33.129 v1(125.013,33.192)
FED_V: U4.3 U4.4 U8.6 | length 157.5
  Top Layer w0.254: U8.6 5.766,34.976 5.766,42.342 11.303,47.879 v1(120.523,47.879) ; U4.3 119.136,21.788 119.786,22.438 ; U4.4 119.786,22.438 ; v1(120.396,22.479) 120.355,22.438 119.786,22.438
  Bottom Layer w0.254: v1(120.396,22.479) 120.396,35.087 120.523,35.214 v1(120.523,47.879)
GND: C21.2 C22.1 R3.2 R4.2 R18.2 R19.2 R26.1 U7.1 U7.16 U8.11 U10.25 U11.4 U14.4 U16.1 U17.1 U17.2 U17.3 U17.4 U17.7 | length 191.4
  Top Layer w0.254: v1(2.413,16.51) 3.937,16.51 v1(4.572,17.145) ; C22.1@4.833,8.44 C22.1 ; C22.1@4.891,8.255 5.969,8.255 6.072,8.255 ; v1(6.037,6.799) 6.072,6.834 6.072,8.255 ; C21.2 C21.2@7.62,11.851 ; R18.2@8.313,25.446 R18.2@8.521,25.654 ; v1(33.274,18.542) 36.322,15.494 36.322,6.35 35.21,5.238 24.226,5.238 22.225,7.239 14.919,7.239 U11.4 11.18,3.552 9.906,4.826 6.477,8.255 6.072,8.255 ; U17.4 U17.3 U17.2 U17.1 ; v1(70.485,27.813) 70.553,27.745 70.553,26.233 R26.1 ; v1(106.045,21.717) 106.045,21.813 105.918,21.94 v1(105.918,25.273) R3.2
  Top Layer w0.508: C22.1@4.833,8.44 4.833,9.064 C21.2 ; U8.11 8.313,24.823 R18.2@8.313,25.446 ; C21.2@7.62,11.851 v1(7.62,13.335) ; R4.2@30.087,22.352 v1(31.369,22.352)
  Bottom Layer w0.254: v1(1.27,7.366) 5.47,7.366 v1(6.037,6.799) ; v1(31.369,22.352) 31.369,30.607 R19.2 ; 33.02,20.701 33.02,18.869 33.274,18.615 v1(33.274,18.542) ; U7.1 34.798,37.798 R19.2 ; U17.4 41.025,26.416 34.798,32.643 R19.2 ; U17.1 64.262,26.416 66.929,29.083 66.929,32.893 70.866,36.83 72.136,36.83 ; v1(70.485,27.813) 72.136,29.464 72.136,36.83 ; U7.16 72.136,37.036 72.136,36.83 ; U10.25 104.521,21.717 v1(106.045,21.717)
  Bottom Layer w0.508: U8.11 7.62,21.082 v1(7.62,13.335)
  other v1: 6.858,1.016 25.781,6.35 113.284,6.35 100.203,8.636 115.697,8.763 119.507,8.763 123.317,8.763 127.127,8.763 113.284,11.049 38.354,12.192 59.436,13.97 63.881,13.97 78.613,14.986 33.274,15.113 67.056,16.129 103.501,16.422 106.172,18.288 30.48,18.542 35.814,18.542 38.481,18.542 61.722,20.828 7.874,21.209 50.419,22.098 93.98,22.606 107.315,22.606 1.524,23.876 30.099,25.146 32.893,25.273 96.139,25.273 58.166,27.94 60.706,27.94 107.061,28.067 82.296,28.829 101.981,30.226 103.759,33.909 72.009,34.163 42.164,37.084 52.832,37.719 90.551,38.735 98.298,38.735 40.767,41.656 63.627,41.783
MOD_A: U10.18 U10.33 U11.2 | length 87.6
  Top Layer w0.254: U11.2 17.653,4.893 17.653,4.931 17.802,5.08 19.812,5.08 21.971,2.921 44.577,2.921 46.914,5.258 67.742,5.258 U10.33
  Bottom Layer w0.254: U10.33 77.216,14.732 77.216,21.463 85.868,30.115 85.868,31.004 U10.18
MOD_B: U10.34 U11.3 | length 58.5
  Top Layer w0.254: U11.3 16.161,5.941 20.348,5.941 22.606,3.683 42.291,3.683 44.628,6.02 65.904,6.02 66.856,6.972 66.916,6.972 U10.34
MOD_C: U10.32 U11.1 | length 58.9
  Top Layer w0.254: U11.1 20.141,2.159 45.847,2.159 47.244,0.762 62.801,0.762 66.536,4.496 68.631,4.496 70.231,6.096 71.12,6.096 U10.32
NetC7_2: C7.2 U1.5 | length 5.1
  Top Layer w0.254: C7.2 122.682,35.293 123.296,34.679 125.081,34.679 125.23,34.828 U1.5
NetC9_2: C9.2 U2.5 | length 3.3
  Top Layer w0.254: C9.2 124.779,18.211 125.23,18.662 U2.5
NetC10_1: C10.1 U2.6 U4.2 | length 15.5
  Top Layer w0.254: U4.2 119.309,21.138 119.507,20.94 120,20.447 v1(120.65,20.447) ; v1(126.365,23.495) 126.365,23.399 126.5,23.264 U2.6 126.5,18.581 C10.1
  Bottom Layer w0.254: v1(120.65,20.447) 123.317,20.447 v1(126.365,23.495)
NetC17_2: C17.2 R17.2 R20.1 U9.3 | length 6.8
  Top Layer w0.254: C17.2 12.942,10.468 R17.2 12.954,11.918 R20.1 15.754,11.924 18.172,11.924 U9.3
NetD1_1: D1.1 R26.2 U13.2 | length 11.3
  Top Layer w0.254: U13.2 72.392,25.794 72.124,26.062 R26.2 72.136,26.174 72.136,27.156 72.285,27.305 D1.1
NetD1_2: D1.2 Q1.3 U13.1 | length 15.5
  Top Layer w0.254: D1.2 78.992,27.006 78.992,20.064 ; U13.1 78.992,20.064 ; Q1.3 84.641,22.352 81.28,22.352 78.992,20.064
NetD2_1: D2.1 R27.1 | length 2.7
  Top Layer w0.254: D2.1 R27.1
NetD3_1: D3.1 R28.1 | length 2.6
  Top Layer w0.254: D3.1 R28.1
NetD4_1: D4.1 R29.1 | length 2.9
  Top Layer w0.254: D4.1 R29.1
NetQ1_1: Q1.1 R22.2 | length 2
  Top Layer w0.254: R22.2 83.759,18.215 Q1.1
NetR1_2: R1.2 U3.5 | length 6.5
  Top Layer w0.254: U3.5 116.056,32.09 116.205,31.941 116.205,29.433 115.889,29.117 115.551,28.779 115.551,28.417 R1.2
NetR2_1: R2.1 U4.5 | length 4.4
  Top Layer w0.254: R2.1 112.163,24.003 112.014,23.854 112.014,23.368 112.395,22.987 112.944,22.438 U4.5
NetR5_1: R5.1 R5.3 U6.5 U6.6 | length 8.8
  Top Layer w0.254: U6.5 17.907,31.115 18.415,30.607 ; R5.3 R5.1 18.288,30.607 18.415,30.607 ; U6.6 18.857,31.049 18.415,30.607
NetR5_2: R5.2 R7.1 | length 1.9
  Top Layer w0.254: R5.2 18.3,22.721 R7.1
NetR9_2: R9.2 R10.1 R11.1 U5.6 | length 7.2
  Top Layer w0.254: R9.2 R10.1 R11.1 16.141,43.319 16.256,43.434 U5.6
NetR12_2: R12.2 U7.4 U10.6 | length 16.1
  Top Layer w0.254: R12.2 R12.2@44.583,37.586 ; U7.4 44.62,37.623 R12.2@44.583,37.586 ; v1(45.847,37.592) 45.841,37.586 R12.2@44.583,37.586
  Bottom Layer w0.254: v1(45.847,37.592) 50.165,33.274 53.594,33.274 U10.6
NetR13_2: R13.2 U7.5 U10.7 | length 16.2
  Top Layer w0.254: R13.2 R13.2@47.123,37.586 ; U7.5 47.16,37.623 R13.2@47.123,37.586 ; v1(48.387,37.592) 48.381,37.586 R13.2@47.123,37.586
  Bottom Layer w0.254: v1(48.387,37.592) 48.387,37.496 48.555,37.328 48.555,37.297 51.689,34.163 55.245,34.163 U10.7
NetR14_2: R14.2 U7.6 U10.8 | length 16
  Top Layer w0.254: U7.6 49.7,37.664 R14.2 49.79,37.586 51.175,37.586 v1(51.181,37.592)
  Bottom Layer w0.254: v1(51.181,37.592) 53.594,35.179 56.769,35.179 U10.8
NetR19_3: R19.3 U7.3 | length 10.5
  Bottom Layer w0.254: R19.3 37.338,35.258 U7.3
NetR30_1: R30.1 R31.1 U18.2 | length 4
  Top Layer w0.254: U18.2 111.817,40.201 113.734,40.201 R30.1 R31.1
NetR31_2: R31.2 R33.2 U18.1 | length 16.7
  Top Layer w0.254: U18.1 111.76,36.449 112.014,36.195 ; v1(112.014,35.179) 112.014,36.195 ; R31.2 113.692,36.727 113.033,36.068 112.141,36.068 112.014,36.195 ; v1(115.697,43.942) 115.755,43.884 117.291,43.884 R33.2
  Bottom Layer w0.254: v1(112.014,35.179) 113.89,37.055 113.89,42.135 v1(115.697,43.942)
NetR32_2: R32.2 R35.1 U18.6 | length 4.5
  Top Layer w0.254: R35.1 118.225,42.406 118.38,42.561 119.142,42.561 U18.6 119.449,42.73 121.596,42.73 R32.2
NetR33_1: R33.1 R34.2 U18.5 | length 23.3
  Top Layer w0.254: R33.1 117.354,45.333 119.374,45.333 U18.5 123.475,45.339 123.729,45.593 v1(123.825,45.593) ; R34.2@120.396,33.389 121.598,32.187 121.598,31.945 v1(121.666,31.877)
  Bottom Layer w0.254: v1(121.666,31.877) 121.666,38.667 122.809,39.81 122.809,44.697 123.37,45.258 123.394,45.258 123.729,45.593 v1(123.825,45.593)
NetR34_1: R34.1 U3.3 U3.4 | length 3.8
  Top Layer w0.254: U3.3 118.943,31.44 119.138,31.635 119.507,31.635 R34.1 ; U3.4 118.039,32.052 118.727,32.052 119.144,31.635
NetU7_7: U7.7 U10.4 | length 25.9
  Top Layer w0.254: U10.4 51.943,32.639 54.61,32.639 61.087,39.116 61.087,40.767 59.817,42.037 53.94,42.037 52.24,40.337 U7.7
NetU7_8: U7.8 U10.3 | length 20.8
  Top Layer w0.254: U10.3 50.165,33.401 53.975,33.401 58.547,37.973 58.547,40.767 58.039,41.275 55.753,41.275 54.78,40.302 U7.8
NetU7_9: U7.9 U10.2 | length 16.6
  Top Layer w0.254: U10.2 48.387,34.163 53.467,34.163 55.118,35.814 55.118,37.798 U7.9
NetU7_10: U7.10 U10.1 | length 21.1
  Top Layer w0.254: U10.1 46.736,35.052 53.213,35.052 54.102,35.941 v1(54.102,36.83)
  Bottom Layer w0.254: v1(54.102,36.83) 56.69,36.83 U7.10
NetU7_11: U7.11 U10.44 | length 39.7
  Top Layer w0.254: U10.44 56.896,22.352 56.896,32.319 62.4,37.823 U7.11
NetU7_12: U7.12 U10.43 | length 39.7
  Top Layer w0.254: U10.43 59.373,22.289 59.373,32.195 64.94,37.762 U7.12
NetU7_13: U7.13 U10.42 | length 39.7
  Top Layer w0.254: U10.42 48.006,8.636 61.976,22.606 61.976,32.639 67.48,38.143 U7.13
NetU7_14: U7.14 U10.41 | length 40.7
  Top Layer w0.254: U10.41 52.324,10.16 53.975,10.16 64.377,20.562 64.377,32.5 70.104,38.227 70.104,39.916 U7.14
NetU10_20: U10.20 U15.3 | length 2.5
  Top Layer w0.254: U10.20 91.186,28.792 U15.3
NetU10_22: U10.22 U15.2 | length 6.2
  Top Layer w0.254: U15.2 95.94,28.757 96.393,29.21 96.393,31.115 U10.22
NTC: C19.2 R7.2 U8.7 U9.5 | length 56.1
  Top Layer w0.254: v1(10.287,14.732) 12.065,14.732 13.081,15.748 13.081,17.653 14.859,19.431 v1(19.939,19.431) 19.939,19.527 19.8,19.666 R7.2 ; U9.5 C19.2 25.789,10.668 v1(27.305,10.668)
  Bottom Layer w0.254: U8.7 4.826,31.496 4.826,24.406 5.356,23.876 7.239,23.876 10.287,20.828 v1(10.287,14.732) ; v1(19.939,19.431) 26.543,19.431 26.797,19.177 26.797,17.966 27.864,16.899 27.864,11.227 v1(27.305,10.668)
RDY: R25.2 U10.12 U12.2 | length 54.2
  Top Layer w0.254: U12.2 26.027,28.999 26.25,29.222 R25.2 26.389,29.222 26.612,28.999 26.612,28.899 28.448,27.063 28.448,24.384 29.337,23.495 53.467,23.495 v1@54.991,25.019
  Bottom Layer w0.254: v1(54.864,25.019) 64.643,25.019 U10.12
RxD: U10.15 U16.2 | length 64.2
  Top Layer w0.254: U10.15 96.647,13.081 U16.2
SCL: R23.2 U3.6 U4.6 U10.35 U12.10 U17.6 | length 118.9
  Top Layer w0.254: U12.10 26.527,21.987 27.559,20.955 43.942,20.955 U17.6 R23.2 ; U4.6 112.197,21.788 111.201,22.784 111.201,26.873 v1(111.252,26.924) 111.252,30.988 111.704,31.44 U3.6
  Bottom Layer w0.254: U17.6 53.975,10.922 63.246,10.922 U10.35 67.31,6.858 87.122,6.858 87.503,7.239 87.503,10.795 103.632,26.924 v1(111.252,26.924)
SDA: R24.2 U3.7 U4.7 U10.36 U12.9 U17.5 | length 120.9
  Top Layer w0.254: U12.9 26.027,21.409 27.243,20.193 42.164,20.193 U17.5 R24.2 ; v1(109.728,23.622) 109.728,22.606 111.633,20.701 112.395,20.701 112.832,21.138 U4.7 ; v1(113.03,27.051) 112.192,27.889 112.192,30.135 112.395,30.338 112.847,30.79 U3.7
  Bottom Layer w0.254: U17.5 52.578,9.779 61.976,9.779 63.246,8.509 U10.36 63.246,6.858 64.389,5.715 88.265,5.715 89.852,7.302 89.852,9.461 104.013,23.622 v1(109.728,23.622) 110.998,23.622 113.081,25.705 113.081,27 v1(113.03,27.051)
SET_A: U10.19 U10.30 U14.2 | length 80.6
  Top Layer w0.254: U10.30 78.486,6.096 80.899,3.683 96.266,3.683 97.79,2.159 v1(120.904,2.159)
  Bottom Layer w0.254: U10.30 78.486,12.192 82.232,15.938 82.232,23.558 88.646,29.972 U10.19 ; v1(120.904,2.159) 126.199,2.159 U14.2
SET_B: U10.31 U14.3 | length 54.2
  Top Layer w0.254: U10.31 75.946,6.477 81.407,1.016 122.516,1.016 U14.3
SET_C: U10.29 U14.1 | length 53.5
  Top Layer w0.254: U10.29 81.026,6.731 82.55,5.207 97.155,5.207 98.806,3.556 117.221,3.556 118.999,5.334 128.246,5.334 U14.1
SWITCH: D2.2 U8.3 U10.9 | length 109.5
  Top Layer w0.254: D2.2 51.548,4.318 v1(62.23,4.318) ; v1(61.849,6.985) 61.849,16.637 v1(63.246,18.034) ; v1(63.246,22.733) U10.9
  Bottom Layer w0.254: U8.3 3.366,24.956 3.366,24.015 0.699,21.348 0.699,14.16 9.97,4.889 9.97,2.476 11.303,1.143 38.862,1.143 40.219,2.5 D2.2 ; v1(61.849,6.985) 61.849,6.889 62.23,6.508 v1(62.23,4.318) ; v1(63.246,18.034) v1(63.246,22.733)
TxD: U10.17 U16.3 | length 60.7
  Top Layer w0.254: U10.17 83.566,28.448 97.663,14.351 133.858,14.351 U16.3
VC: C14.2 U5.3 U8.8 | length 31.8
  Top Layer w0.254: U5.3 C14.2@25.273,43.434 ; C14.2 v1(26.746,43.434)
  Bottom Layer w0.254: U8.8 9.593,30.226 12.387,33.02 15.621,33.02 20.044,33.02 20.777,33.753 20.777,37.465 v1(26.746,43.434)
VDIS: R17.1 U8.9 | length 19.6
  Top Layer w0.254: v1(11.43,13.462) 11.436,13.456 11.436,11.936 R17.1
  Bottom Layer w0.254: U8.9 8.89,27.686 11.43,25.146 v1(11.43,13.462)
VOUT: R10.2 U8.4 | length 23.2
  Top Layer w0.254: U8.4 3.556,27.813 4.699,28.956 7.038,28.956 7.874,29.792 7.874,42.672 10.021,44.819 R10.2
pads on no net: U1.1 U1.3 U1.7 U1.8 U2.1 U2.3 U2.7 U2.8 U7.0 U10.5 U10.13 U10.14 U10.16 U10.21 U10.24 U10.26 U10.27 U10.37 U10.38 U10.39 U10.40

## Polygon pours and split planes (outlines as drawn)
AGND on Top Layer "Top Layer-AGND" (solid, remove dead copper, pour order 2): 9.271,9.779 9.271,26.416 9.144,26.543 0.127,26.543 0.127,50.038 0.254,49.911 137.922,49.911 137.922,23.368 131.445,23.368 131.445,15.494 108.966,15.494 108.966,43.942 29.083,43.942 29.083,8.128 10.922,8.128
GND on Top Layer "Top Layer-GND" (solid, remove dead copper, pour order 9): 0.127,-0.046 0.127,26.543 9.144,26.543 9.271,26.416 9.271,9.779 10.922,8.128 29.083,8.128 29.083,43.942 108.966,43.942 108.966,15.494 131.445,15.494 131.445,23.368 137.922,23.368 137.922,-0.046
GND on Bottom Layer "Bottom Layer-GND" (solid, remove dead copper, pour order 10): 0.127,-0.046 0.127,26.543 9.144,26.543 9.271,26.416 9.271,9.779 10.922,8.128 29.083,8.128 29.083,43.942 108.966,43.942 108.966,15.494 131.445,15.494 131.445,23.368 137.922,23.368 137.922,-0.046
AGND on Bottom Layer "Bottom Layer-AGND" (solid, remove dead copper, pour order 3): 9.271,9.779 9.271,26.416 9.144,26.543 0.127,26.543 0.127,50.038 0.254,49.911 137.922,49.911 137.922,23.368 131.445,23.368 131.445,15.494 108.966,15.494 108.966,43.942 29.083,43.942 29.083,8.128 10.922,8.128

## Keep-outs
Keep-Out Layer:
  the board outline again, w0.127

## Other copper
Top Layer:
  pour cut-out: 23.283,21.082 23.283,28.702 27.813,28.702 27.813,21.082
  pour cut-out: 112.395,29.117 119.507,29.117 119.507,33.097 112.395,33.097
  pour cut-out: 112.395,19.465 119.507,19.465 119.507,23.445 112.395,23.445
Multi-Layer:
  pour cut-out: 131.5,2.5 ccw(c135.5,2.5) 135.5,-1.5 ccw(c135.5,2.5) 139.5,2.5 ccw(c135.5,2.5) 135.5,6.5 ccw(c135.5,2.5)
  pour cut-out: 102.5,9 ccw(c106.5,9) 106.5,5 ccw(c106.5,9) 110.5,9 ccw(c106.5,9) 106.5,13 ccw(c106.5,9)
  pour cut-out: 131.5,47.5 ccw(c135.5,47.5) 135.5,43.5 ccw(c135.5,47.5) 139.5,47.5 ccw(c135.5,47.5) 135.5,51.5 ccw(c135.5,47.5)
  pour cut-out: 102.5,40 ccw(c106.5,40) 106.5,36 ccw(c106.5,40) 110.5,40 ccw(c106.5,40) 106.5,44 ccw(c106.5,40)
  pour cut-out: 31.5,36 cw(c31.5,40) 27.5,40 cw(c31.5,40) 31.5,44 cw(c31.5,40) 35.5,40 cw(c31.5,40)
  pour cut-out: 27.5,9 ccw(c31.5,9) 31.5,5 ccw(c31.5,9) 35.5,9 ccw(c31.5,9) 31.5,13 ccw(c31.5,9)
  pour cut-out: 2.5,-1.5 cw(c2.5,2.5) -1.5,2.5 cw(c2.5,2.5) 2.5,6.5 cw(c2.5,2.5) 6.5,2.5 cw(c2.5,2.5)
  pour cut-out: 2.5,43.5 cw(c2.5,47.5) -1.5,47.5 cw(c2.5,47.5) 2.5,51.5 cw(c2.5,47.5) 6.5,47.5 cw(c2.5,47.5)
  pour cut-out: 15.621,30.607 15.621,35.687 20.066,35.687 20.066,30.607

## Silkscreen, mask and mechanical layers (free items; w line width, h text height)
Top Overlay:
  text "CC" at 88.392,5.223 h1.52
  text "FAN" at 70.231,5.207 h1.52
  text "SWITCH" at 53.34,4.969 h1.52
Top Solder:
  text "XMeter V1.5 sTeeLM" at 87.884,40.656 h1.52
Mechanical 15:
  circle w0.127: c2.5,47.5 r4
  circle w0.127: c2.5,2.5 r4
  circle w0.127: c135.5,2.5 r4
  circle w0.127: c135.5,47.5 r4
  circle w0.127: c31.5,40 r4
  circle w0.127: c106.5,40 r4
  circle w0.127: c106.5,9 r4
  circle w0.127: c31.5,9 r4
  lines w0.127: 15.621,30.607 20.066,30.607 20.066,35.687 15.621,35.687 15.621,30.607 ; 23.283,21.082 27.813,21.082 27.813,28.702 23.283,28.702 23.283,21.082 ; 112.395,19.465 112.395,23.445 119.507,23.445 119.507,19.465 112.395,19.465 ; 112.395,29.117 112.395,33.097 119.507,33.097 119.507,29.117 112.395,29.117
  lines w0.254: 0.127,26.543 0.127,-0.046 137.922,-0.046 137.922,23.368 ; 0.127,26.543 0.127,50.038 0.254,49.911 9.398,49.911 137.922,49.911 137.922,23.368 ; 0.127,26.543 9.144,26.543 9.271,26.416 9.271,9.779 10.922,8.128 29.083,8.128 29.083,43.942 108.966,43.942 108.966,15.494 131.445,15.494 131.445,23.368 137.922,23.368

## Text inside footprints (layer, text, board x,y; h text height)
U10: Bottom Overlay "STC89C516" at 72.136,10.176 h1.52
U11: Bottom Overlay "V" at 9.147,5.151 h0.76; Bottom Overlay "G" at 11.688,5.159 h0.76; Bottom Overlay "B" at 14.228,5.151 h0.76; Bottom Overlay "A" at 16.768,5.151 h0.76; Bottom Overlay "C" at 19.308,5.159 h0.76
U13: Top Overlay "+" at 79.756,17.811 h1.52 r180
U14: Bottom Overlay "V" at 120.427,5.151 h0.76; Bottom Overlay "G" at 122.968,5.159 h0.76; Bottom Overlay "B" at 125.508,5.151 h0.76; Bottom Overlay "A" at 128.048,5.151 h0.76; Bottom Overlay "C" at 130.588,5.159 h0.76